# EAGLE board PS_5V_and_33V (EAGLE 5.06)
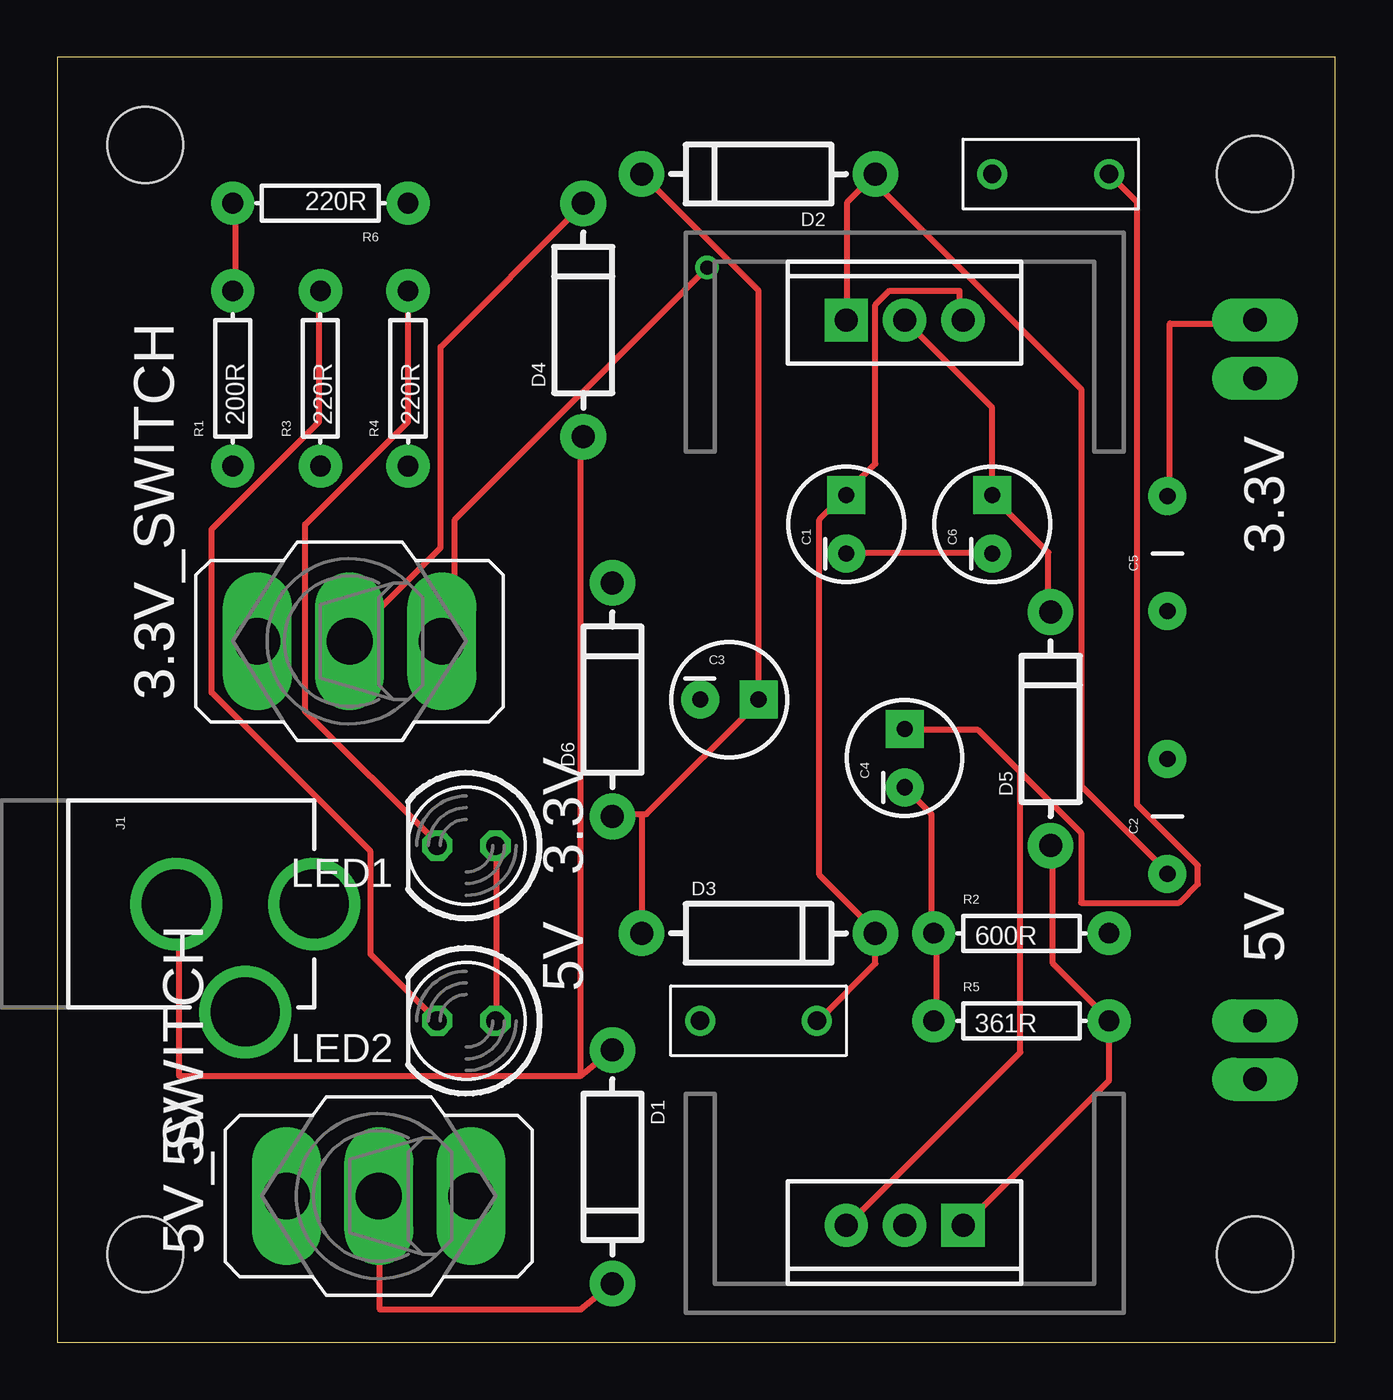
[diagram p0: board, top side]
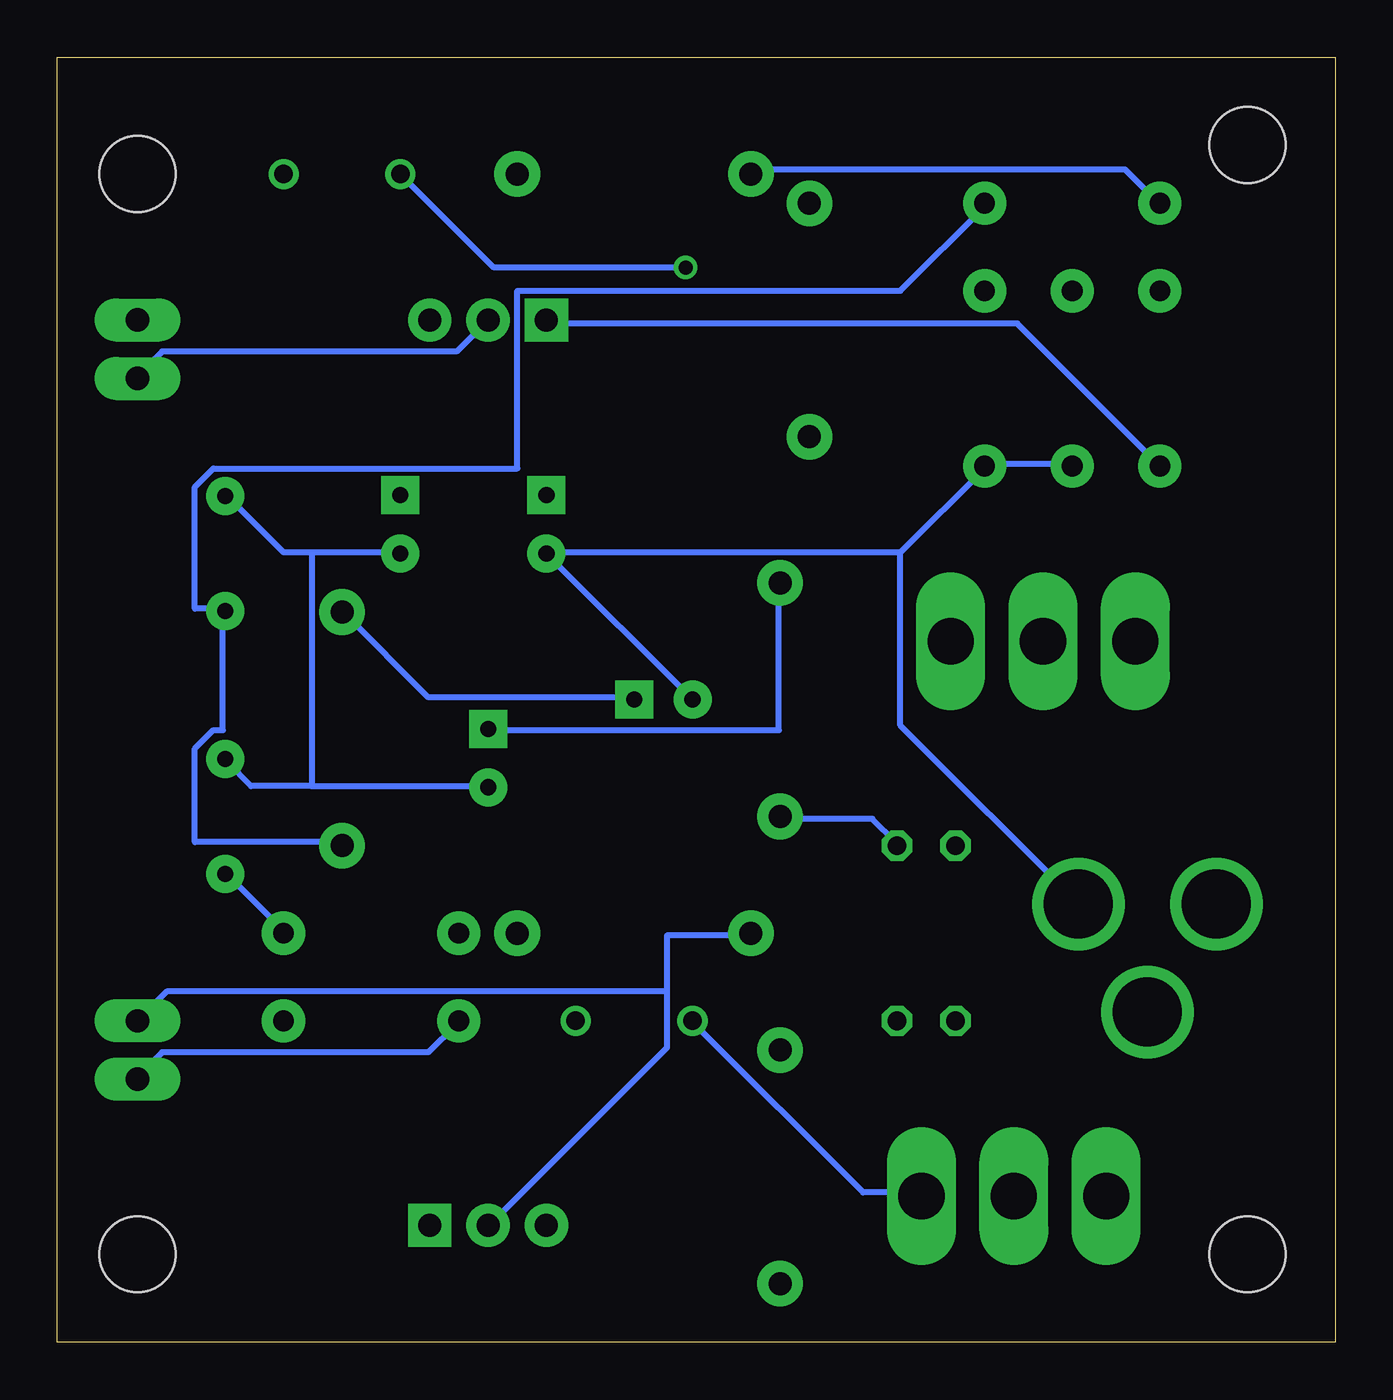
[diagram p1: board, bottom side, seen from below]

Size 55.55 x 55.87 mm. Coordinates in mm from the lower left corner, seen from the top.
Outline: 0,0 55.55,0 55.55,55.87 0,55.87 0,0
Copper layers (1*16): Top 0.035mm / dielectric 1.5mm / Bottom 0.035mm
Design rules "default": minimum track width 10mil, minimum drill 24mil, track to track 8mil, track to pad 8mil, pad to pad 8mil, via to via 8mil, smd to smd 8mil, copper to edge 40mil, drill to drill 8mil, minimum pad ring 10mil, minimum via ring 8mil, stop-mask expansion 4mil, vias tented up to drill 0mil, thermal gap 10mil

## Footprints (pad centres in the part's own frame; a part is rotated, then mirrored left to right if it is on the bottom)
1X02_LONGPADS = drill 1.016 pad 1.88 long: 1 0,0; 2 2.54,0
320-916 = drill 2.007 long: 1 0,4.013; 2 0,0; 3 0,-4.013
CPOL-RADIAL-10UF-25V = drill 0.7 pad 1.651 square: 1 1.27,0 | drill 0.7 pad 1.651 round: 2 -1.27,0
CAP-PTH-5MM = drill 0.7 pad 1.651 round: 1 -2.5,0; 2 2.5,0
DIODE-1N4001 = drill 1 pad 1.981 round: A -5.08,0; C 5.08,0
PTC = drill 0.8 round: P$1 -2.54,0; P$2 2.54,0
POWER_JACK_PTH = drill 2.997 round: GND 0,7.7; GNDBREAK 4.7,10.7; PWR 0,13.7
STAND-OFF = hole 3.302: 0,0
LED5MM = drill 0.813 octagon: A -1.27,0; K 1.27,0
AXIAL-0.3 = drill 0.9 pad 1.88 round: P$1 -3.81,0; P$2 3.81,0
TO220-ADJ = drill 1 pad 1.88 square: ADJ -2.54,0 | drill 1 pad 1.88 round: IN 2.54,0; OUT 0,0

## Placement (x,y rotation side)
3.3V_HEADER  [1X02_LONGPADS]  52.07,13.97 270 top
3.3V_SWITCH  3.3V_SWITCH  [320-916]  12.7,30.48 90 top
5V_HEADER  [1X02_LONGPADS]  52.07,41.91 90 top
5V_SWITCH  [320-916]  13.97,6.35 90 top
C1  0.1 uF  [CPOL-RADIAL-10UF-25V]  34.29,35.56 90 top
C2  10 uF  [CAP-PTH-5MM]  48.26,22.86 90 top
C3  0.1 uF  [CPOL-RADIAL-10UF-25V]  29.21,27.94 0 top
C4  0.1 uF  [CPOL-RADIAL-10UF-25V]  36.83,25.4 90 top
C5  10 uF  [CAP-PTH-5MM]  48.26,34.29 90 top
C6  0.1 uF  [CPOL-RADIAL-10UF-25V]  40.64,35.56 90 top
D1  [DIODE-1N4001]  24.13,7.62 270 top
D2  [DIODE-1N4001]  30.48,50.8 180 top
D3  [DIODE-1N4001]  30.48,17.78 0 top
D4  [DIODE-1N4001]  22.86,44.45 90 top
D5  [DIODE-1N4001]  43.18,26.67 90 top
D6  [DIODE-1N4001]  24.13,27.94 90 top
F1  PTCPTH  [PTC]  30.48,13.97 0 top
F2  PTCPTH  [PTC]  43.18,50.8 0 top
J1  POWER_JACKPTH  [POWER_JACK_PTH]  -2.54,19.05 270 top
JP1  STAND-OFF  [STAND-OFF]  3.81,3.81 0 top
JP2  STAND-OFF  [STAND-OFF]  52.07,50.8 0 top
JP3  STAND-OFF  [STAND-OFF]  52.07,3.81 0 top
JP4  STAND-OFF  [STAND-OFF]  3.81,52.07 0 top
LED1  [LED5MM]  17.78,21.59 180 top
LED2  [LED5MM]  17.78,13.97 180 top
R1  200R  [AXIAL-0.3]  7.62,41.91 90 top
R2  600R  [AXIAL-0.3]  41.91,17.78 0 top
R3  220R  [AXIAL-0.3]  11.43,41.91 90 top
R4  220R  [AXIAL-0.3]  15.24,41.91 90 top
R5  361R  [AXIAL-0.3]  41.91,13.97 0 top
R6  220R  [AXIAL-0.3]  11.43,49.53 180 top
U$1  V_REG_317SINK  [TO220-ADJ]  36.83,44.45 0 top
U$2  V_REG_317SINK  [TO220-ADJ]  36.83,5.08 180 top

## Library data of the parts
3.3V_HEADER 5V_HEADER C1-C6 D1-D6 F1 F2 J1 JP1-JP4 R1-R6 U$1 U$2 = SparkFun
3.3V_SWITCH 5V_SWITCH = switch
LED1 LED2 = led

## Nets
GND: 3.3V_HEADER.2 5V_HEADER.2 C1.2 C2.2 C3.2 C4.2 C5.2 C6.2 J1.PWR R2.P$1 R3.P$1 R4.P$1 R5.P$1
N$1: 5V_SWITCH.2 D1.C
N$2: C1.1 D3.C F1.P$2 U$1.IN
N$3: C2.1 D2.A R1.P$1 R2.P$2 U$1.ADJ
N$4: LED1.K R4.P$2
N$5: 5V_SWITCH.3 F1.P$1
N$6: D1.A D4.A J1.GND
N$7: 3.3V_SWITCH.2 D4.C
N$8: C4.1 D6.C F2.P$2 U$2.IN
N$9: C5.1 D5.A R5.P$2 R6.P$1 U$2.ADJ
N$10: LED2.K R3.P$2
N$11: 3.3V_SWITCH.3 F2.P$1
VCC: 3.3V_HEADER.1 5V_HEADER.1 C3.1 C6.1 D2.C D3.A D5.C D6.A LED1.A LED2.A R1.P$2 R6.P$2 U$1.OUT U$2.OUT

## Tracks (layer width: path | path; a pad name or v marks a point on that pad's centre or on a via)
GND
  Top 0.254: C4.2 38,22.96 38,17.88 R2.P$1 38.2,17.68 38.2,14.02 R5.P$1 | C6.2 40.64,34.34 34.34,34.34 C1.2 | 5V_HEADER.2 52.02,44.3 48.36,44.3 48.36,36.98 C5.2
  Bottom 0.254: 44.5,24.18 36.98,24.18 C4.2 | 44.5,24.18 47.14,24.18 48.16,25.2 C2.2 | 3.3V_HEADER.2 52.02,11.58 51,12.6 39.42,12.6 38.2,13.82 R5.P$1 | R3.P$1 11.58,38.2 15.24,38.2 R4.P$1 15.24,38 18.9,34.34 | C3.2 C1.2 34.14,34.34 18.9,34.34 | 44.5,34.34 40.64,34.34 C6.2 | 44.5,34.34 45.72,34.34 48.16,36.78 C5.2 | 18.9,34.34 18.9,26.82 11.18,19.1 J1.PWR | 44.5,34.34 44.5,24.18
N$1
  Top 0.254: D1.C 22.76,1.42 14.02,1.42 14.02,6.3 5V_SWITCH.2
N$2
  Top 0.254: F1.P$2 33.12,14.02 35.56,16.46 D3.C 35.56,17.88 33.12,20.32 33.12,35.76 34.14,36.78 C1.1 34.34,36.98 35.56,38.2 35.56,45.11 36.17,45.72 39.22,45.72 39.22,44.5 U$1.IN
N$3
  Top 0.254: 35.36,50.6 34.34,49.58 34.34,44.5 U$1.ADJ | 35.36,50.6 44.5,41.45 44.5,24.18 48.16,20.52 C2.1 | 35.36,50.6 D2.A
  Bottom 0.254: C2.1 48.16,20.32 45.72,17.88 R2.P$2 | R1.P$1 13.82,44.3 34.14,44.3 U$1.ADJ
N$4
  Top 0.254: R4.P$2 15.24,40.03 10.77,35.56 10.77,27.43 16.46,21.74 LED1.K
N$5
  Bottom 0.254: F1.P$1 27.84,13.82 20.52,6.5 18.09,6.5 5V_SWITCH.3
N$6
  Top 0.254: 22.76,11.58 5.28,11.58 5.28,18.9 J1.GND | 22.76,11.58 22.76,39.22 D4.A | 22.76,11.58 D1.A
N$7
  Top 0.254: D4.C 22.76,49.38 16.66,43.28 16.66,34.54 12.8,30.68 12.8,30.48 3.3V_SWITCH.2
N$8
  Top 0.254: F2.P$2 46.94,49.58 46.94,23.37 49.58,20.73 49.58,19.91 48.77,19.1 44.5,19.1 44.5,22.15 41.86,24.79 | 41.86,24.79 40.03,26.62 36.98,26.62 C4.1 | 41.86,24.79 41.86,12.6 34.34,5.08 U$2.IN
  Bottom 0.254: D6.C 24.18,32.92 24.18,26.62 36.78,26.62 C4.1
N$9
  Top 0.254: U$2.ADJ 39.42,5.08 45.72,11.38 R5.P$2 45.72,14.02 43.28,16.46 43.28,21.54 D5.A
  Bottom 0.254: D5.A 43.28,21.74 49.58,21.74 49.58,25.81 48.77,26.62 48.36,26.62 48.36,31.7 C5.1 48.36,31.9 49.58,31.9 49.58,37.19 48.77,38 35.56,38 35.56,45.72 18.9,45.72 15.24,49.38 R6.P$1
N$10
  Top 0.254: LED2.K 13.61,16.87 13.61,21.34 6.71,28.25 6.71,35.36 11.38,40.03 11.38,45.72 R3.P$2
N$11  (via drill 0.61)
  Top 0.254: v28.25,46.74 17.27,35.76 17.27,30.89 16.87,30.48 3.3V_SWITCH.3
  Bottom 0.254: F2.P$1 36.58,46.74 v28.25,46.74
VCC
  Top 0.254: D5.C 43.08,31.9 43.08,34.34 40.64,36.78 C6.1 40.64,40.64 U$1.OUT | R1.P$2 7.72,45.72 7.72,49.38 R6.P$2 | LED2.A 19.1,14.02 19.1,21.54 LED1.A | 25.4,22.96 24.18,22.96 D6.A | 25.4,22.96 25.6,22.96 30.48,27.84 C3.1 30.48,45.72 D2.C | 25.4,22.96 D3.A
  Bottom 0.254: 5V_HEADER.1 52.02,42.06 51,43.08 38.2,43.08 U$1.OUT | D2.C 25.2,51 9.14,51 7.72,49.58 R6.P$2 | LED1.A 19.1,21.74 20.12,22.76 23.98,22.76 D6.A | 29.06,15.24 29.06,17.68 25.4,17.68 D3.A | 29.06,15.24 29.06,12.8 36.78,5.08 U$2.OUT | 29.06,15.24 50.8,15.24 3.3V_HEADER.1 | D5.C 43.08,31.7 39.42,28.04 30.48,28.04 C3.1

## Text on the board
tPlace: 3.3V | 3.3V | 3.3V | 5V | 5V | 5V